# Altium PCB Layout.PcbDoc
Units mil, origin at the board's own origin, x right, y up, seen from the top; angles counter-clockwise.
Board outline 3500 x 2000 mil, 2 copper layers (Top Layer, Bottom Layer); 52 components, 31 nets, 176 pads, 30 vias.
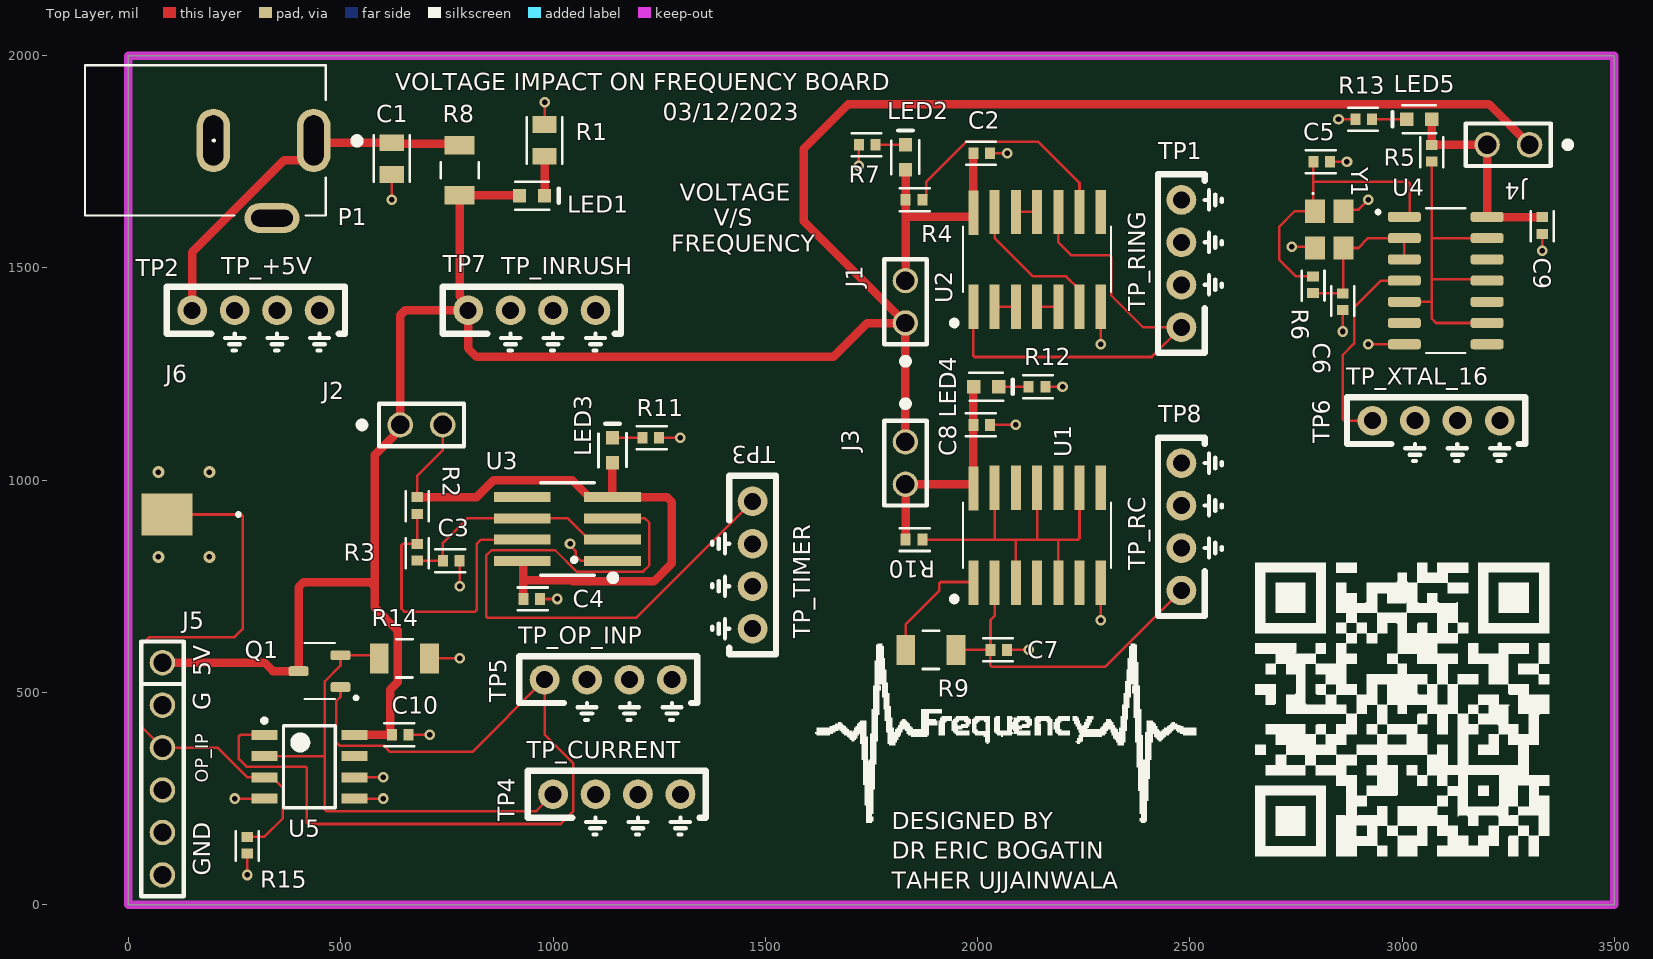
[diagram p0: Top Layer view]
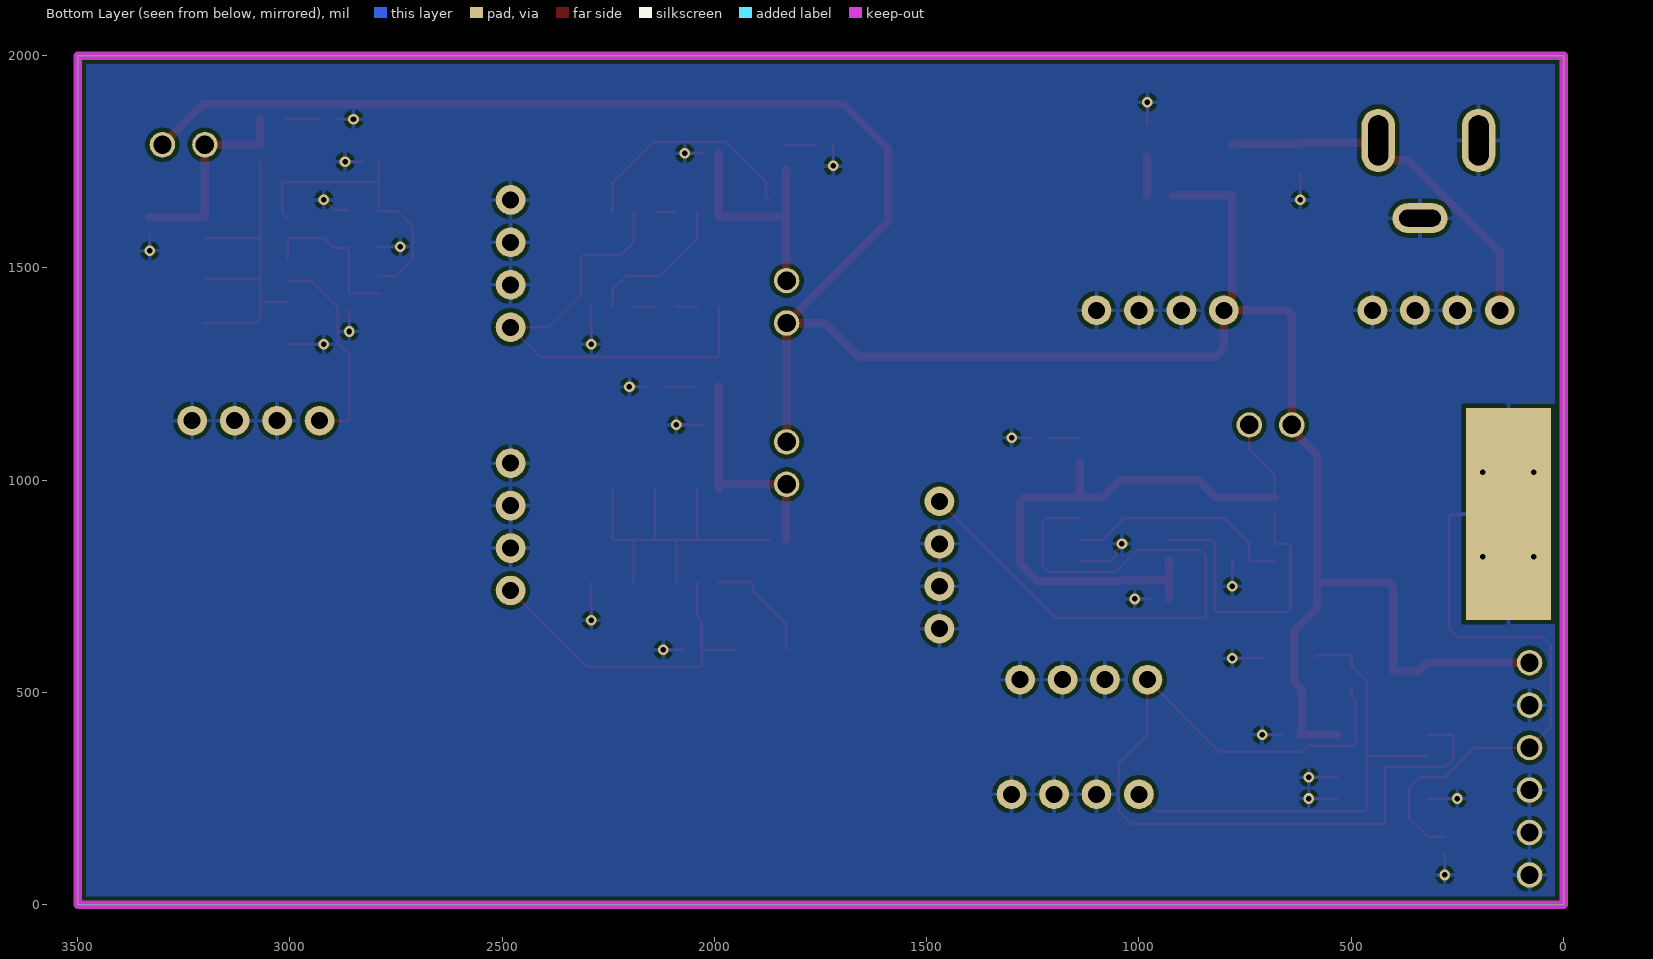
[diagram p1: Bottom Layer view, seen from below]
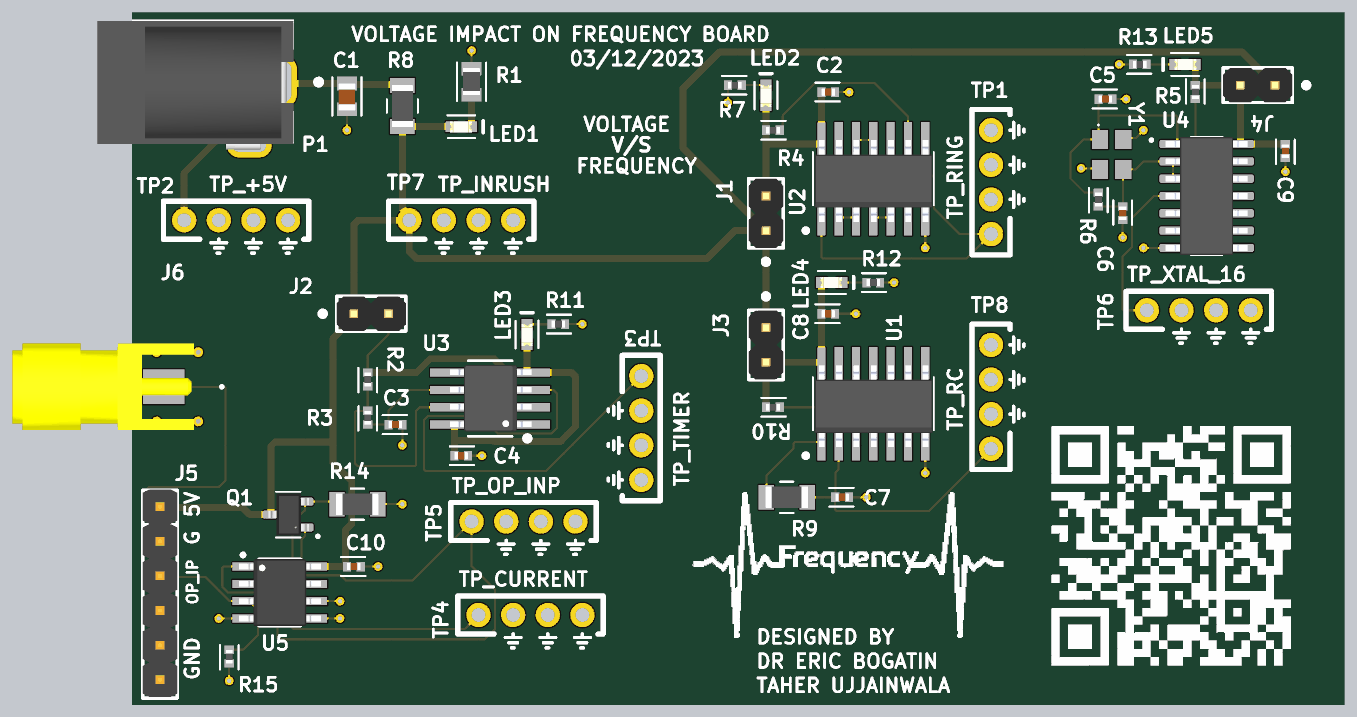
[diagram p2: 3D render of the assembled board from above, using the file's embedded part models]

## Layer stack, top to bottom
Top Solder: solder mask 0.4, Solder Resist, Dk 3.5
Top Layer: signal copper 1.4
Dielectric 1: dielectric 12.6, FR-4, Dk 4.8
Bottom Layer: signal copper 1.4
Bottom Solder: solder mask 0.4, Solder Resist, Dk 3.5

## Board outline
0,0 3500,0 3500,2000 0,2000

## Design rules (kind name [scope] priority, off if disabled: settings)
Clearance [All] p1: gap=10 ignorepadtopadclearanceinfootprint=FALSE except(0: Arc-Hole Track-Hole SMDPad-Hole THPad-Hole Via-Hole Fill-Hole Poly-Hole Region-Hole Text-Hole)
HoleSize [All] p1: absolutevalues=TRUE maxlimit=200 minlimit=1 maxpercent=80.000 minpercent=20.000
PolygonConnect [All] p1: connectstyle=Relief reliefconductorwidth=10 reliefentries=4 polygonreliefangle="90 Angle" airgapwidth=10
RoutingVias [All] p1: holewidth=13 width=25 viastyle="Through Hole" minholewidth=13 minwidth=25 maxholewidth=25 maxwidth=80
SolderMaskExpansion [All] p1: expansion=4 istentingtop=FALSE
UnRoutedNet [All] p1: checkbadconnections=TRUE
Width All6 [All] p1: maxlimit=100 minlimit=6 preferedwidth=6 minimp=50.000000 maximp=50.000000 favimp=50.000000
Width "Power - XTAL" [InNet('VCC_XTAL')] p2: maxlimit=100 minlimit=20 preferedwidth=20 minimp=50.000000 maximp=50.000000 favimp=50.000000
Width "Power - RING" [InNet('VCC_RING')] p3: maxlimit=100 minlimit=20 preferedwidth=20 minimp=50.000000 maximp=50.000000 favimp=50.000000
Width "Power - RC" [InNet('VCC_RC')] p4: maxlimit=100 minlimit=20 preferedwidth=20 minimp=50.000000 maximp=50.000000 favimp=50.000000
Width "Power - 555" [InNet('VCC_555')] p5: maxlimit=100 minlimit=20 preferedwidth=20 minimp=50.000000 maximp=50.000000 favimp=50.000000
Width "Power Rail +5V" [InNet('VCC_+5V')] p6: maxlimit=100 minlimit=20 preferedwidth=20 minimp=50.000000 maximp=50.000000 favimp=50.000000
28 further rules are at their usual default settings.

## Components (designator, comment, footprint, x,y, rotation, side; value= is the part's Value field where it differs from the comment)
C1 "22uF" 0805_Passive_Capaciitor 620,1757.4 r90 top
C2 "1uF" 0402_Passive_Capacitor 2010,1770 r180 top
C3 "150pF" 0402_Passive_Capacitor 760,810 r180 top
C4 "1uF" 0402_Passive_Capacitor 950,720 r0 top
C5 "22pF" 0402_Passive_Capacitor 2810.32,1750 r180 top
C6 "22pF" 0402_Passive_Capacitor 2860,1420 r90 top
C7 "22pF" 0402_Passive_Capacitor 2050,600 r180 top
C8 "1uF" 0402_Passive_Capacitor 2009.69,1130 r180 top
C9 "1uF" 0402_Passive_Capacitor 3330,1599.69 r270 top
C10 "1uF" 0402_Passive_Capacitor 640,400 r180 top
J1 "2 PIN" 2_PIN_100MIL 1830,1420 r90 top
J2 "2 PIN" 2_PIN_100MIL 690,1130 r0 top
J3 "2 PIN" 2_PIN_100MIL 1830,1040 r270 top
J4 "2 PIN" 2_PIN_100MIL 3250,1790 r180 top
J5 "MALE" 6_PIN_100MIL-Male 80,570 r270 top
J6 "SMA Edge Launched" SMA_2_LAYER 80.5,919 r90 top
LED1 "KT-0603R" LED_0603 950.47,1670 r0 top value=Red
LED2 "KT-0603R" LED_0603 1830,1760.47 r90 top value=Red
LED3 "KT-0603R" LED_0603 1140,1070 r90 top value=Red
LED4 "KT-0603R" LED_0603 2020,1220 r0 top value=Red
LED5 "KT-0603R" LED_0603 3040,1850 r180 top value=Red
P1 "Power Jack" Power_Jack 436.22,1800 r180 top value="CONN PWR JACK 2X5.5MM SOLDER"
Q1 "AO3400A" N-MOSFET 450,550 r180 top value="N channel"
R1 "1k" 0805_Passive_Resistor 980,1800 r90 top value="1K Ohm"
R2 "1 Ohm" 0402_Passive_Resistor 680,940.32 r270 top value="5.23 KOhm"
R3 "2.55 KOhms" 0402_Passive_Resistor 680,830 r270 top value="2.55 KOhm"
R4 "10k" 0402_Passive_Resistor 1850,1660 r0 top value=10KOhm
R5 "10k" 0402_Passive_Resistor 3070,1770 r90 top value=10KOhm
R6 "1M" 0402_Passive_Resistor 2790,1460 r270 top value="1M Ohm"
R7 "10k" 0402_Passive_Resistor 1740.32,1790 r180 top value=10KOhm
R8 "1 Ohm" 1206_Passive_Resitor 780,1730 r270 top value=1Ohm
R9 "4.7KOhm" 1206_Passive_Resitor 1890,600 r180 top
R10 "10k" 0402_Passive_Resistor 1850,860 r0 top value=10KOhm
R11 "10k" 0402_Passive_Resistor 1230.31,1100 r0 top value=10KOhm
R12 "10k" 0402_Passive_Resistor 2140,1220 r0 top value=10KOhm
R13 "10k" 0402_Passive_Resistor 2909.69,1850 r180 top value=10KOhm
R14 "4.7Ohm" 1206_Passive_Resitor 650,580 r0 top
R15 "10k" 0402_Passive_Resistor 280,140 r270 top value=10KOhm
TP1 "TP_RING_OSC" TP10x_Probe 2480,1510 r90 top
TP2 "TP_5V" TP10x_Probe 300,1400 r0 top
TP3 "TP_555_Output" TP10x_Probe 1470,800 r270 top
TP4 "TP_MOSFET" TP10x_Probe 1150,260 r0 top
TP5 "10x Probe TP" TP10x_Probe 1130,530 r0 top
TP6 "TP_16MHz_BUFF" TP10x_Probe 3080,1140 r0 top
TP7 "10x Probe TP" TP10x_Probe 950,1400 r0 top
TP8 "TP_RC_OSC" TP10x_Probe 2480,890 r90 top
U1 "SN74AHC14DR" HEX_74AC14 2140,870 r90 top
U2 "SN74AHC14DR" HEX_74AC14 2140,1520 r90 top
U3 "LMC555CMX/NOPB" TS555IDTTR 1033.7,885 r180 top
U4 "SN74AHC14DR" SOIC127P600X175-14N 3102.56,1470 r0 top
U5 "MCP6002T-I/SN" SOIC127P600X175-8N 426.3,325 r0 top
Y1 "X322516MLB4SI" "Crystal resonator" 2830,1590 r270 top value=16MHz

## Footprints (in the part's own frame and the unit in brackets; to place one, negate y for a bottom-side part, rotate by r counter-clockwise, add the part's x,y. Pads: shape width x height; smd on the part's side, far side on the other; paste and mask are expansions set on the pad)
2_PIN_100MIL [mil]
  round 60 hole 43.31: 1(-50,0) 2(50,0)
  silkscreen extent -145,-50 100,50, body extent -100,-50 100,50, height 336
6_PIN_100MIL-Male [mil]
  round 60 hole 43.31: 1(0,0) 2(100,0) 3(200,0) 4(300,0) 5(400,0) 6(500,0)
  silkscreen extent -50,-50 550,50, body extent -53,-50 547,50, height 337
0402_Passive_Capacitor [mm] "Reference: https://www.worthingtonassembly.com/perfect-0402-footprint"
  rect 0.6x0.7 smd mask+0: 1(-0.5,0) 2(0.5,0)
  silkscreen extent -0.84,-0.69 0.94,0.69, body extent -0.5,-0.27 0.5,0.28, height 0.5
0402_Passive_Resistor [mm] "Reference: https://www.worthingtonassembly.com/perfect-0402-footprint"
  rect 0.6x0.7 smd mask+0: 1(-0.5,0) 2(0.5,0)
  silkscreen extent -0.84,-0.69 0.94,0.69, body extent -0.49,-0.25 0.51,0.25, height 0.4
0805_Passive_Capaciitor [mm] "Reference: http://livepartlibrary.com/fpdimensions.html"
  rect 1x1.45 smd mask+0: 1(-0.95,0) 2(0.95,0)
  silkscreen extent -1.4,-1.07 1.4,1.07, body extent -1.04,-0.62 0.96,0.63, height 1.4
0805_Passive_Resistor [mm] "Reference: http://livepartlibrary.com/fpdimensions.html"
  rect 1x1.45 smd mask+0: 1(-0.95,0) 2(0.95,0)
  silkscreen extent -1.4,-1.07 1.4,1.07, body extent -0.98,-0.62 1.02,0.63, height 0.5
1206_Passive_Resitor [mil]
  rect 44x71 smd: 1(-59,0) 2(59,0)
  silkscreen extent -19,-45 19,45, body extent -61,-31 61,31, height 26
"Crystal resonator" [mil]
  rect 55.11x47.24 smd: 1(-43.3,-35.43) 2(43.31,-35.43) 3(43.32,31.5) 4(-43.3,31.5)
  silkscreen extent -87,-42 -83,-38, body extent -65,-47 65,47, height 31
HEX_74AC14 [mm]
  rect 2.65x0.6 smd: 1(-2.836,3.81) 2(-2.836,2.54) 3(-2.836,1.27) 4(-2.836,0) 5(-2.836,-1.27) 6(-2.836,-2.54) 7(-2.836,-3.81) 8(2.836,-3.81) 9(2.836,-2.54) 10(2.836,-1.27) 11(2.836,0) 12(2.836,1.27) 13(2.836,2.54) 14(2.794,3.81)
  silkscreen extent -3.94,-4.43 1.95,5.08, body extent -3.18,-4.35 2.82,4.3, height 1.75
LED_0603 [mm]
  rect 0.8x0.8 smd: 1(-0.75,0) 2(0.75,0)
  silkscreen extent -1.02,-0.84 1.6,0.84, body extent -0.84,-0.41 0.76,0.39, height 0.55
N-MOSFET [mm]
  rrect50% 1.21x0.59 smd: 1(-1.255,0.95) 2(-1.255,-0.95) 3(1.255,0)
  silkscreen extent -2.28,-1.68 0.89,1.7, body extent -1.55,-1.55 1.45,1.55, height 1.25
Power_Jack [mm]
  oval 2x3.8 hole 1.2 slot 3 at 90 deg: 1(0,0) 2(6,0)
  oval 3.3x1.8 hole 1 slot 2.5 at 0 deg: 3(2.5,4.65)
  silkscreen extent -2.79,-4.5 13.68,4.5, body extent -0.76,-4.45 13.64,4.95, height 11.49
SMA_2_LAYER [mil]
  rect 100x120 smd: 1(0,-10)
  rect 500x200 smd far side: 2(1,-49.5)
  silkscreen extent -4,-182 4,-174, body extent -125,-98 125,427, height 150
SOIC127P600X175-8N [mm] "SOIC, 8-Leads, Body 4.90x3.90mm, Pitch 1.27mm, IPC Medium Density"
  rect 1.55x0.6 smd: 1(-2.7,1.905) 2(-2.7,0.635) 3(-2.7,-0.635) 4(-2.7,-1.905) 5(2.7,-1.905) 6(2.7,-0.635) 7(2.7,0.635) 8(2.7,1.905)
  silkscreen extent -2.82,-2.45 1.55,2.88, body extent -3,-2.45 3,2.45, height 1.75
SOIC127P600X175-14N [mm]
  rrect50% 1.97x0.6 smd: 1(-2.475,3.81) 2(-2.475,2.54) 3(-2.475,1.27) 4(-2.475,0) 5(-2.475,-1.27) 6(-2.475,-2.54) 7(-2.475,-3.81) 8(2.475,-3.81) 9(2.475,-2.54) 10(2.475,-1.27) 11(2.475,0) 12(2.475,1.27) 13(2.475,2.54) 14(2.475,3.81)
  silkscreen extent -4.15,-4.33 1.17,4.33, body extent -3,-4.33 3,4.33, height 1.75
TP10x_Probe [mil] "Small Probs footprint"
  round 70 hole 40: 1(-150,0) 2(-50,0) 2(50,0) 2(150,0)
  silkscreen extent -210,-95 210,55
TS555IDTTR [mm] "IC OSC Single Timer 2.7MHz 8SOIC"
  rect 3.4x0.6 smd: 1(-2.7,1.905) 2(-2.7,0.635) 3(-2.7,-0.635) 4(-2.7,-1.905) 5(2.7,-1.905) 6(2.7,-0.635) 7(2.7,0.635) 8(2.7,1.905)
  silkscreen extent -2.85,-2.77 1.6,3.05, body extent -3.03,-2.48 2.96,2.43, height 1.75

## Part data
C1: library part C_22uF_0805, "MULTILAYER CERAMIC CAPACITORS MLCC - SMD/SMT 22UF 25V 0805 ROHS", LCSC Part#=C45783, MFR Part #=CL21A226MAQNNNE, Datasheet=https://datasheet.lcsc.com/szlcsc/Samsung-Electro-Mechanics-CL21A226MAQNNNE_C45783.pdf, Type=Basic
C2 C4 C8 C9 C10: library part C_1uF_0402, "MULTILAYER CERAMIC CAPACITORS MLCC - SMD/SMT 1UF 25V 0402 ROHS", LCSC Part#=C52923, MFR Part #=CL05A105KA5NQNC, Datasheet=https://datasheet.lcsc.com/szlcsc/Samsung-Electro-Mechanics-CL05A105KA5NQNC_C52923.pdf, Type=Basic
C3: library part C_150pF_0402, "MULTILAYER CERAMIC CAPACITORS MLCC - SMD/SMT 1UF 25V 0402 ROHS", LCSC Part#=C1527, MFR Part #=0402B151K500NT, Datasheet=https://datasheet.lcsc.com/lcsc/1810302110_FH--Guangdong-Fenghua-Advanced-Tech-0402B151K500NT_C1527.pdf, Type=Basic
C5 C6 C7: library part C_22pF_0402, "MULTILAYER CERAMIC CAPACITORS MLCC - SMD/SMT 22PF 50V 0402 ROHS", LCSC Part#=C1555, MFR Part #=0402CG220J500NT, Datasheet=https://datasheet.lcsc.com/szlcsc/Guangdong-Fenghua-Advanced-Tech-0402CG220J500NT_C1555.pdf, Type=Basic
J1 J2 J3 J4: library part JM_2_PIN_MALE, "2.54mm Straight 2 1 Header，Breakaway Through Hole,P=2.54mm Pin Header & Female Header ROHS", LCSC Part#=C124375, MFR Part #=B-2100S02P-A110, Datasheet=https://datasheet.lcsc.com/lcsc/1811151421_Ckmtw-Shenzhen-Cankemeng-B-2100S02P-A110_C124375.pdf, Type=Extended
J5: library part JM_6_PIN_MALE, "Male header- 6 pin 1 row- through Hole", LCSC Part#=C37208, Datasheet=https://datasheet.lcsc.com/szlcsc/1810312320_BOOMELE-Boom-Precision-Elec-C37208_C37208.pdf, Type=Extended
J6: library part J_SMA_2_Layer, "2 Layer SMA Connector Without Cutout Under Signal"
LED1 LED2 LED3 LED4 LED5: library part LED_RED_0603, "LIGHT EMITTING DIODES (LED) RED 520~625NM 90~100MCD@20MA TOP VIEW 0603 ROHS", LCSC Part#=C2286, Datasheet=https://datasheet.lcsc.com/szlcsc/Everlight-Elec-19-217-BHC-ZL1M2RY-3T_C72041.pdf, MFR Part #=KT-0603R, Type=Basic
P1: library part "P_Power Jack", "Power Barrel Connector Jack 2.10mm ID (0.083\"), 5.50mm OD (0.217\") Through Hole, Right Angle", LCSC Part#=C136744, Digikey Link=https://www.digikey.com/product-detail/en/PJ-102A/CP-102A-ND/275425/?itemSeq=304982367, Digikey Part=CP-102A-ND, Type=Extended
Q1: library part Q_Nch_MOSFET, "MOSFET N Trench 30V 5.7A 1.5V @ 250uA 26.5 m? @ 5.7A,10V SOT-23-3L RoHS", LCSC Part#=C20917, Datasheet=https://datasheet.lcsc.com/szlcsc/Alpha-Omega-Semicon-AOS-AO3400A_C20917.pdf, MFR Part #=AO3400A, Type=Basic
R1: library part R_1K_0805, "CHIP RESISTOR - SURFACE MOUNT 1KOHMS ±1% 1/8W 0805 ROHS", LCSC Part#=C17513, MFR Part #=0805W8F1001T5E, Type=Basic
R2: library part R_5.23KOhm_0402, "62.5mW Thick Film Resistors 50V ±100ppm/℃ ±1% -55℃~+155℃ 5.23kΩ 0402 Chip Resistor - Surface Mount ROHS", LCSC Part#=C25907, MFR Part #=0402WGF5231TCE, Datasheet=https://datasheet.lcsc.com/lcsc/2206010045_UNI-ROYAL-Uniroyal-Elec-0402WGF5231TCE_C25907.pdf, Type=Basic
R3: library part "R_2.55 KOhm_0402", "62.5mW Thick Film Resistors 50V ±100ppm/℃ ±1% -55℃~+155℃ 2.55kΩ 0402 Chip Resistor - Surface Mount ROHS", LCSC Part#=C185431, MFR Part #=RC0402FR-072K55L, Datasheet=https://datasheet.lcsc.com/lcsc/2206010045_UNI-ROYAL-Uniroyal-Elec-0402WGF5231TCE_C25907.pdf, Type=Basic
R4 R5 R7 R10 R11 R12 R13 R15: library part R_10KOhm_0402, "CHIP RESISTOR - SURFACE MOUNT 10KOHMS ±1% 1/16W 0402 ROHS", LCSC Part#=C25744, MFR Part #=0402WGF1002TCE, Datasheet=https://datasheet.lcsc.com/szlcsc/Uniroyal-Elec-0402WGF1002TCE_C25744.pdf, Type=Basic
R6: library part R_1M_0402, "CHIP RESISTOR - SURFACE MOUNT 1MOHMS ±1% 1/16W 0402 ROHS", LCSC Part#=C26083, MFR Part #=0402WGF1004TCE, Datasheet=https://datasheet.lcsc.com/szlcsc/Uniroyal-Elec-0402WGF1004TCE_C26083.pdf, Type=Basic
R8: library part R_1Ohm_1206, "1Ω ±5% 0.25W ±400ppm/℃ 1206 Chip Resistor - Surface Mount RoHS", LCSC Part#=C1409, MFR Part #=1206W4J010JT5E, Datasheet=https://datasheet.lcsc.com/lcsc/1810301410_UNI-ROYAL-Uniroyal-Elec-1206W4J010JT5E_C1409.pdf, Type=Extended
R9: library part R_4.7k_1206, "4.7kΩ ±1% 0.25W ±100ppm/℃ 1206 Chip Resistor - Surface Mount RoHS", LCSC Part#=C17936, MFR Part #=1206W4F4701T5E, Datasheet=https://datasheet.lcsc.com/lcsc/1810301414_UNI-ROYAL-Uniroyal-Elec-1206W4F4701T5E_C17936.pdf, Type=Basic
R14: library part R_4.7Ohm_1206, "4.7Ω ±5% 0.25W ±400ppm/℃ 1206 Chip Resistor - Surface Mount RoHS", LCSC Part#=C17937, MFR Part #=1206W4F470KT5E, Datasheet=https://datasheet.lcsc.com/lcsc/2206010145_UNI-ROYAL-Uniroyal-Elec-1206W4F470KT5E_C17937.pdf, Type=Extended
TP1 TP2 TP3 TP4 TP5 TP6 TP7 TP8: library part TP_10x_Probe, "Test Point 300 mil centers"
U1 U2: library part U_74_AHC_Hex, "Inverter IC 6 Channel Schmitt Trigger 14-SOIC", LCSC Part#=C6942, Datasheet=https://datasheet.lcsc.com/szlcsc/ON-Semicon-ON-74AC14SCX_C5482.pdf, MFR Part #=SN74AHC14DR, Type=Extended
U3: library part U_555_Fast, "555 Type, Timer/Oscillator _Single_ IC 3MHz 8-SO", LCSC Part#=C90760, Package=SOIC-8, DigiKey-Purchase-URL=https://www.digikey.com/product-detail/en/texas-instruments/LMC555CMX-NOPB/LMC555CMX-NOPBCT-ND/1010550, MFR Part #=LMC555CMX/NOPB, Type=Extended
U4: "6-ch, 2-V to 5.5-V inverters with Schmitt-Trigger inputs", Package="SOIC-14 Texas Instruments", Availability="In Stock", Check_prices=https://www.snapeda.com/parts/SN74AHC14DR/Texas+Instruments/view-part/?ref=eda, MF="Texas Instruments", MP=SN74AHC14DR, Price=None, Purchase-URL=https://pricing.snapeda.com/search/part/SN74AHC14DR/?ref=eda, SnapEDA_Link=https://www.snapeda.com/parts/SN74AHC14DR/Texas+Instruments/view-part/?ref=snap
U5: library part U_MCP6002T-I/SN, "0.6 V/us 2 1MHz 1.8V ~ 6V 100μA General Purpose SOIC-8_150mil  Operational Amplifier ROHS", LCSC Part#=C7377, Mfr=Microchip, Datasheet=https://ww1.microchip.com/downloads/en/DeviceDoc/MCP6001-1R-1U-2-4-1-MHz-Low-Power-Op-Amp-DS20001733L.pdf, MFR Part #=MCP6002T-I/SN, Type=Basic
Y1: library part X_16Mhz_Res, "±10ppm 16000000Hz -40℃~85℃ 贴片无源晶振 60Ω 9pF SMD3225-4P Crystals ROHS", LCSC Part#=C13738, MFR Part #=X322516MLB4SI, Type=Basic

## Via types
v1: diameter 25, hole 13, Top Layer to Bottom Layer, 26 vias
v2: diameter 28, hole 13, Top Layer to Bottom Layer, 4 vias

## Nets (pads, with @x,y where several pads share a name; then routed paths per layer and width w, separated by ;. In a path a pad name is that pad's centre, name@x,y a point inside that pad or via, vN(x,y) a via of type N, cw(c..) or ccw(c..) an arc to the next point about the centre after c; other vN are vias at no path point)
16M_BUF_OUT: TP6.1 U4.4 | length 490.3
  Top Layer w6: TP6.1 2863.51,1140 2860,1143.51 2860,1294.79 2886.78,1321.57 2886.78,1406.78 2950,1470 U4.4
16M_O1: C5.2 R6.1 U4.1 Y1.1 | length 706.2
  Top Layer w6: R6.1 2750.32,1479.68 2710,1520 2710,1596.61 2746.7,1633.3 Y1.1 2790.63,1637.24 2790.63,1702.32 ; C5.2 2790.63,1702.32 ; U4.1 3009.09,1620 3017.68,1628.59 3017.68,1698.81 3014.16,1702.32 2790.63,1702.32
16M_O2: C6.2 R6.2 U4.2 U4.3 Y1.3 | length 381.2
  Top Layer w6: R6.2 2790.63,1439.69 C6.2 2861.5,1441.18 Y1.3 2896.68,1546.68 2920,1570 U4.2 U4.3
555_Output: TP3.1 U3.3 | length 1493.8
  Top Layer w6: U3.3 1216.49,910 1226.94,899.54 1226.94,799.44 1212,784.5 1055.5,784.5 1005.19,834.81 855.09,834.81 842.56,822.28 842.56,679.07 846.07,675.56 1195.56,675.56 TP3.1
GND: C1.1 C2.1 C3.1 C4.2 C5.1 C6.1 C7.1 C8.1 C9.2 C10.1 J5.2 J5.4 J5.5 J5.6 J6.2 P1.2 P1.3 R1.2 R7.2 R11.2 R12.2 R13.2 R14.2 R15.2 TP1.2 TP2.2 TP3.2 TP4.2 TP5.2 TP6.2 TP7.2 TP8.2 U1.7 U2.7 U3.1 U4.7 U5.4 U5.5 U5.6 Y1.2 Y1.4 | length 1564
  Top Layer w6: v1(250,250) U5.4 ; v1(280,70) R15.2 ; U5.5 v1(600,250) ; U5.6 v1(600,300) ; v1(620,1660) C1.1 ; C10.1 v1(710,400) ; R14.2 v1(780,580) ; C3.1 780,809.68 v1(780,750) ; C4.2 v1(1010,720) ; R1.2 v1(980,1890) ; v1(1040,850) 1040,845.8 1053.1,832.7 1053.1,822.4 1065.5,810 U3.1 ; R11.2 v1(1300,1100) ; v1(1720,1740) 1720,1789.37 R7.2 ; C8.1 v1(2090,1130) ; C2.1 v1(2070,1770) ; C7.1 v1(2120,600) ; R12.2 v1(2200,1220) ; v1(2290,670) U1.7 ; v1(2290,1320) U2.7 ; v1(2740,1550) 2791.26,1550 Y1.2 ; C5.1 v1(2870,1750) ; v1(2850,1850) R13.2 ; v1(2860,1350) C6.1 ; Y1.4 2865.35,1637.16 2897.16,1637.16 v1(2920,1660) ; v1(2920,1320) U4.7 ; v1(3330,1540) C9.2
  other v2: 70.5,819 190.5,819 70.5,1019 190.5,1019
NetC1_2: C1.2 P1.1 R8.1 TP2.1 | length 891.6
  Top Layer w20: TP2.1 150,1537.06 366.85,1753.91 409.09,1753.91 436.22,1781.04 P1.1 441.42,1794.8 C1.2 622.9,1791.9 777.1,1791.9 R8.1
NetC3_2: C3.2 R3.2 U3.2 U3.6 | length 546.9
  Top Layer w6: R3.2 740,810.31 C3.2 740.31,849.5 740.32,852.14 798.18,910 U3.6 1034.88,910 1084.88,860 U3.2
NetC7_2: C7.2 R9.1 TP8.1 U1.2 | length 806.3
  Top Layer w6: R9.1 C7.2 ; U1.2 2040,680 2030.31,670.31 C7.2 ; TP8.1 2300,560 2033.51,560 2030,563.51 2030,599.69 C7.2
NetLED1_2: LED1.2 R1.1 | length 92.6
  Top Layer w20: LED1.2 R1.1
NetLED2_2: LED2.2 R7.1 | length 70
  Top Layer w6: R7.1 LED2.2
NetLED3_2: LED3.2 R11.1 | length 70.8
  Top Layer w6: LED3.2 1210.16,1099.53 R11.1
NetLED4_2: LED4.2 R12.1 | length 70.8
  Top Layer w6: LED4.2 R12.1
NetLED5_2: LED5.2 R13.1 | length 81.1
  Top Layer w6: R13.1 LED5.2
NetR2_2: R2.2 R3.1 U3.7 | length 708
  Top Layer w6: R2.2 R3.1 646.51,849.68 643,846.17 643,697 650,690 816.49,690 820,693.51 820,850 830,860 U3.7
NetR9_2: R9.2 U1.1 | length 271.3
  Top Layer w6: R9.2 1831,661 1910,740 1910,756.49 1913.51,760 1988.35,760 U1.1
NetU2_2: U2.2 U2.3 | length 50
  Top Layer w6: U2.2 U2.3
NetU2_4: U2.4 U2.5 | length 50
  Top Layer w6: U2.4 U2.5
NetU2_11: U2.11 U2.12 | length 50
  Top Layer w6: U2.12 U2.11
OP_OUT: Q1.1 TP5.1 U5.1 | length 2097
  Top Layer w6: U5.1 263.51,400 260,396.49 260,342.63 277.44,325.19 416.49,325.19 420,321.67 420,193.51 423.51,190 1017.88,190 1048,220.12 1048,332.4 980,400.4 TP5.1 810,360 616.34,360 601.53,374.81 497.08,374.81 489.09,382.8 489.09,479.09 499.41,489.41 Q1.1
RC_PUP: R10.2 U1.3 U1.5 U1.9 U1.11 U1.13 | length 937.3
  Top Layer w6: R10.2 2040,860 ; U1.13 2040,860 ; U1.3 2090,860 ; U1.11 2140,860 ; U1.5 2190,858.24 2188.24,860 ; U1.9 2240,863.51 2236.49,860 2188.24,860 ; 2040,860 2090,860 ; 2090,860 2140,860 ; 2140,860 2188.24,860
RING_BUF: U2.6 U2.13 | length 352.3
  Top Layer w6: U2.13 2040,1570 2130,1480 2208.7,1480 2240,1448.7 U2.6
RING_OSC: TP1.1 U2.1 U2.10 | length 1132.5
  Top Layer w6: U2.1 1990,1293.51 1993.51,1290 2410,1290 TP1.1 2390,1360 2314.81,1435.19 2314.81,1525.19 2310,1530 2220,1530 2190,1560 U2.10
RING_PUP: R4.2 U2.9 | length 554.9
  Top Layer w6: R4.2 1878.5,1668.81 1878.5,1702.16 1973.12,1796.78 2143.22,1796.78 2240,1700 U2.9
SMA_INPUT: J5.3 J6.1 R15.1 U5.3 | length 1458.4
  Top Layer w6: J6.1 265.49,919 269,915.49 269,649 250,630 50,630 30,610 30,420 J5.3 210,370 280,300 U5.3 338.7,300 363.51,275.19 363.51,203.51 319.68,159.68 R15.1
V_CUR: Q1.2 R14.1 TP4.1 U5.2 | length 1171.8
  Top Layer w6: U5.2 462.59,350 ; R14.1 583.6,587.4 Q1.2 499.41,563.01 462.59,526.2 462.59,350 ; TP4.1 960,220 466.11,220 462.59,223.51 462.59,350
VCC_555: C4.1 J2.2 LED3.1 R2.1 U3.4 U3.8 | length 1517.8
  Top Layer w6: R2.1 680,1010 740,1070 J2.2
  Top Layer w20: R2.1 820.38,960 860.38,1000 1044.88,1000 1084.88,960 U3.4 ; U3.8 928.5,810 930.32,808.19 930.32,764.09 ; C4.1 930.32,764.09 ; LED3.1 U3.4 ; 930.32,764.09 1043.38,764.09 1045.97,761.5 1237.46,761.5 1280,804.04 1280,948.28 1268.28,960 U3.4
VCC_+5V: C10.2 J1.1 J2.1 J3.1 J4.1 J5.1 LED1.1 Q1.3 R8.2 TP7.1 U5.8 | length 6169
  Top Layer w20: J5.1 320,570 340,550 Q1.3 400.59,747.69 412.31,759.41 570.59,759.41 580,750 ; U5.8 C10.2 ; C10.2@616.14,406.14 616.14,506.14 634,524 634,646 580,700 580,750 ; LED1.1 920.44,1670.5 788.5,1670.5 788,1671 R8.2 780,1433.53 800,1413.53 TP7.1 ; J3.1 J1.1 ; J4.1 3204.25,1885.75 1695.75,1885.75 1590,1780 1590,1610 J1.1 ; 580,750 580,1059.18 640,1119.18 640,1388.28 651.72,1400 TP7.1 ; TP7.1 800,1310 820,1290 1660,1290 1740,1370 J1.1
VCC_RC: C8.2 J3.2 LED4.1 R10.1 U1.14 | length 531.1
  Top Layer w20: R10.1 1830.16,860.16 1830.16,989.84 J3.2 1988.19,990 U1.14@1990,988.19 ; U1.14 U1.14@1990,988.19 ; LED4.1 1990.24,1219.76 1990.24,1130.24 C8.2 U1.14@1990,988.19
VCC_RING: C2.2 J1.2 LED2.1 R4.1 U2.14 | length 570.1
  Top Layer w20: J1.2 1830.16,1470.16 1830.16,1620 ; LED2.1 1830.16,1730.79 1830.16,1660.16 R4.1 1830.16,1659.84 1830.16,1620 ; C2.2 1990.16,1769.84 1990.16,1621.97 1988.19,1620 1830.16,1620
VCC_XTAL: C9.1 J4.2 LED5.1 R5.2 U4.14 | length 490.9
  Top Layer w20: LED5.1 3069.76,1849.76 3069.76,1789.92 R5.2 3070.16,1789.84 3199.84,1789.84 J4.2 U4.14 3200.31,1619.69 3329.69,1619.69 C9.1
XTAL_PUP: R5.1 U4.5 U4.9 U4.11 U4.13 | length 830.4
  Top Layer w6: U4.5 3070,1420 ; R5.1 3070,1570 ; U4.9 3080,1370 3070,1380 3070,1420 ; U4.11 3197.42,1472.58 3070,1472.58 ; U4.13 3070,1570 ; 3070,1420 3070,1472.58 ; 3070,1472.58 3070,1570
pads on no net: U1.4 U1.6 U1.8 U1.10 U1.12 U2.8 U3.5 U4.6 U4.8 U4.10 U4.12 U5.7

## Polygon pours and split planes (outlines as drawn)
GND on Bottom Layer "GND_L02_P000" (solid, pour order 0): 0,0 3500,0 3500,2000 0,2000

## Keep-outs
Keep-Out Layer:
  the board outline again, w20

## Silkscreen, mask and mechanical layers (free items; w line width, h text height)
Top Overlay:
  drawing of 58 lines, arcs and shapes, not listed
  text "VOLTAGE IMPACT ON FREQUENCY BOARD" at 628,1918 h40
  text "03/12/2023" at 1258,1848 h40
  text "VOLTAGE" at 1298,1658 h40
  text "V/S" at 1379,1599 h40
  text "FREQUENCY" at 1278,1538 h40
  text "TP_+5V" at 218,1484.66 h40
  text "TP_INRUSH" at 878,1484.66 h40
  text "TP_RING" at 2395.34,1398 h40 r90
  text "TP_XTAL_16" at 2868,1224.66 h40
  text "TP_RC" at 2395.34,788 h40 r90
  text "TP_TIMER" at 1605.34,628 h40 r90
  text "TP_OP_INP" at 918,614.66 h40
  text "5V" at 192,538 h40 r90
  text "G" at 192,458 h40 r90
  text "TP_CURRENT" at 938,344.66 h40
  text "OP_IP" at 188,287 h30 r90
  text "DESIGNED BY" at 1798,178 h40
  text "DR ERIC BOGATIN" at 1798,108 h40
  text "GND" at 192,68 h40 r90
  text "TAHER UJJAINWALA" at 1798,38 h40

## Text inside footprints (layer, text, board x,y; h text height)
J6: Mechanical 13 "Edge" at 10.77,874 h50 r90